# Altium PCB PCB3.PcbDoc
Units mm, origin at the board's own origin, x right, y up, seen from the top; angles counter-clockwise.
Board outline 61.81 x 53.79 mm, 2 copper layers (Top Layer, Bottom Layer); 12 components, 9 nets, 48 pads, 8 vias.
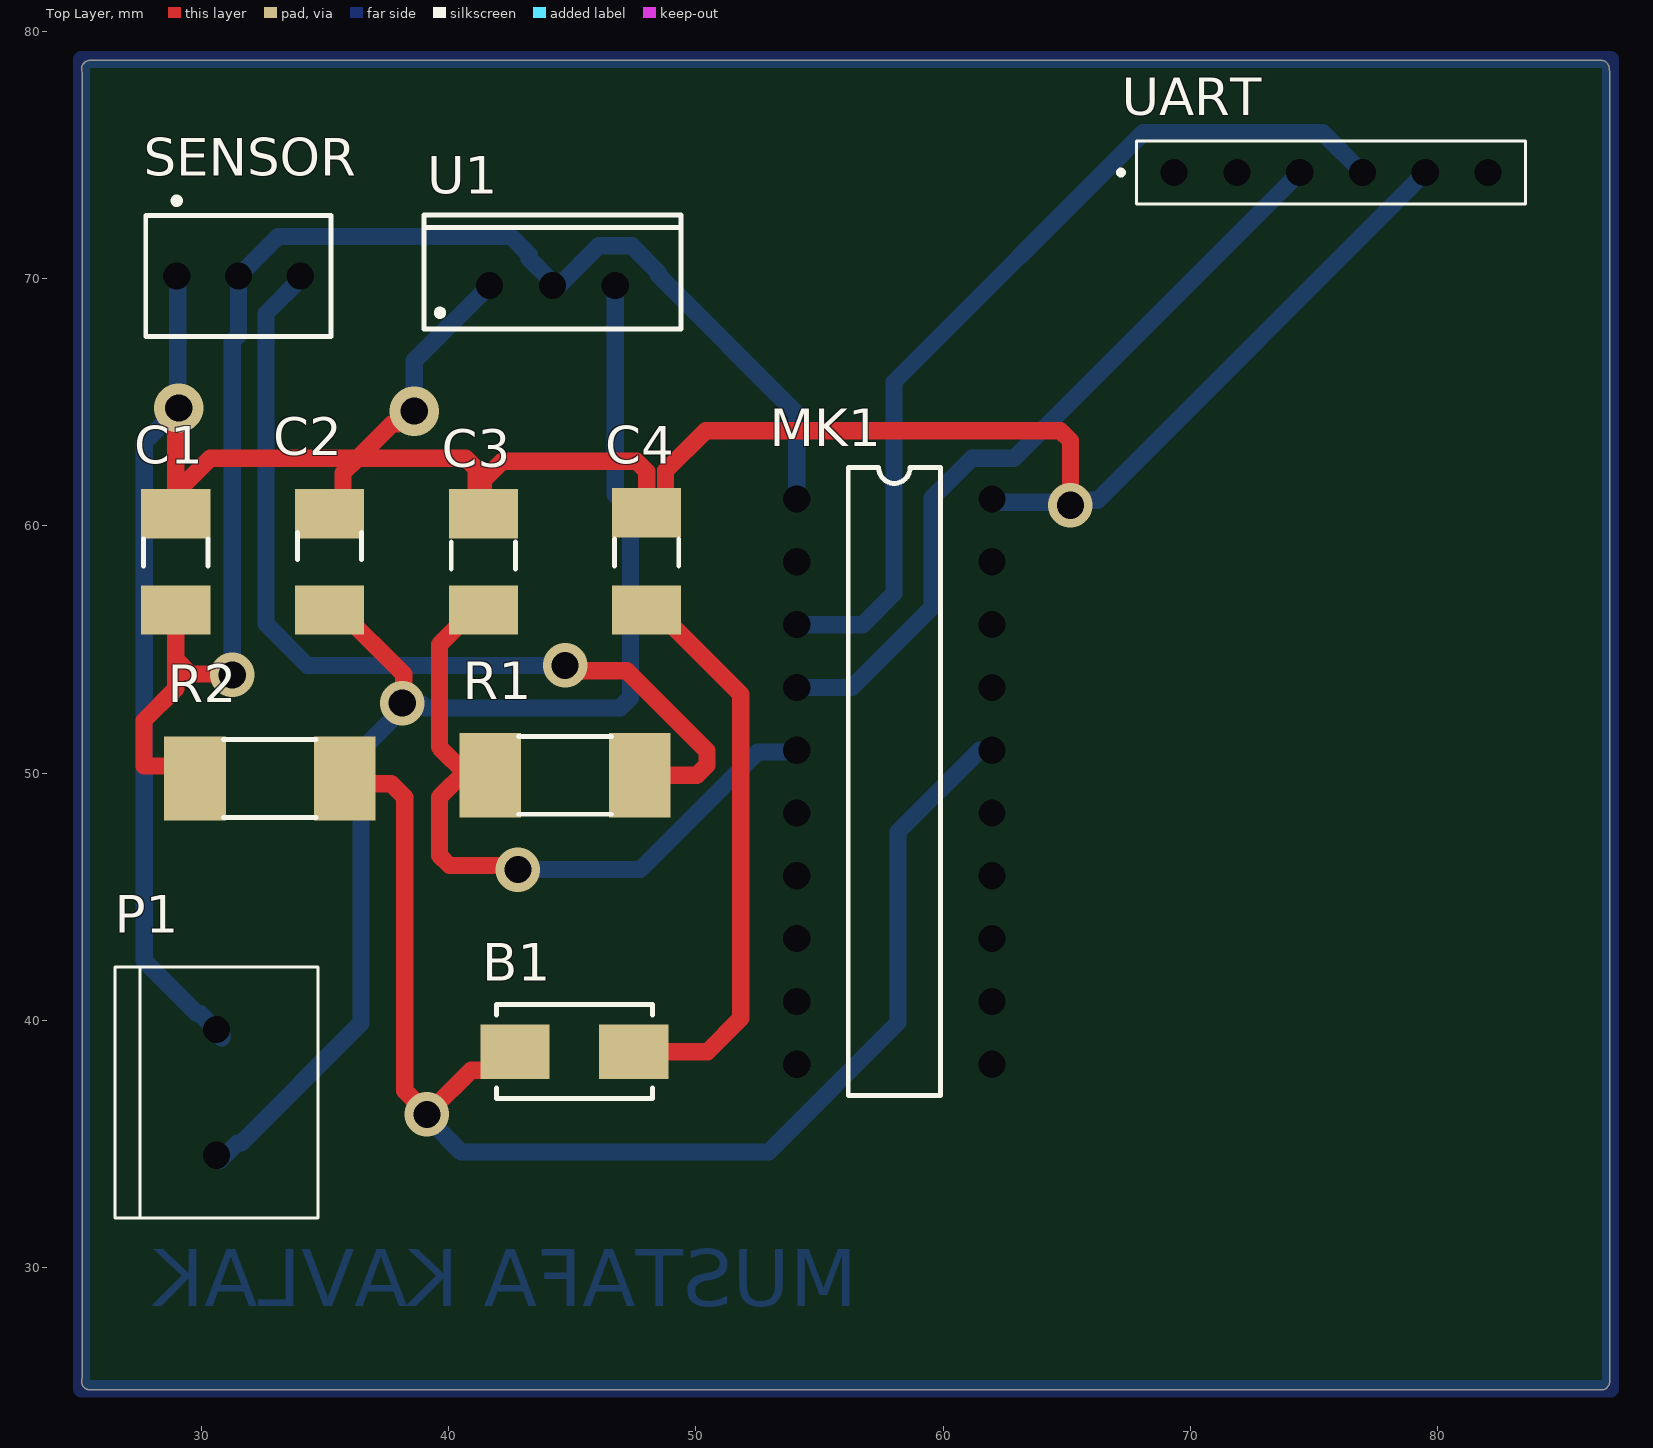
[diagram p0: Top Layer view]
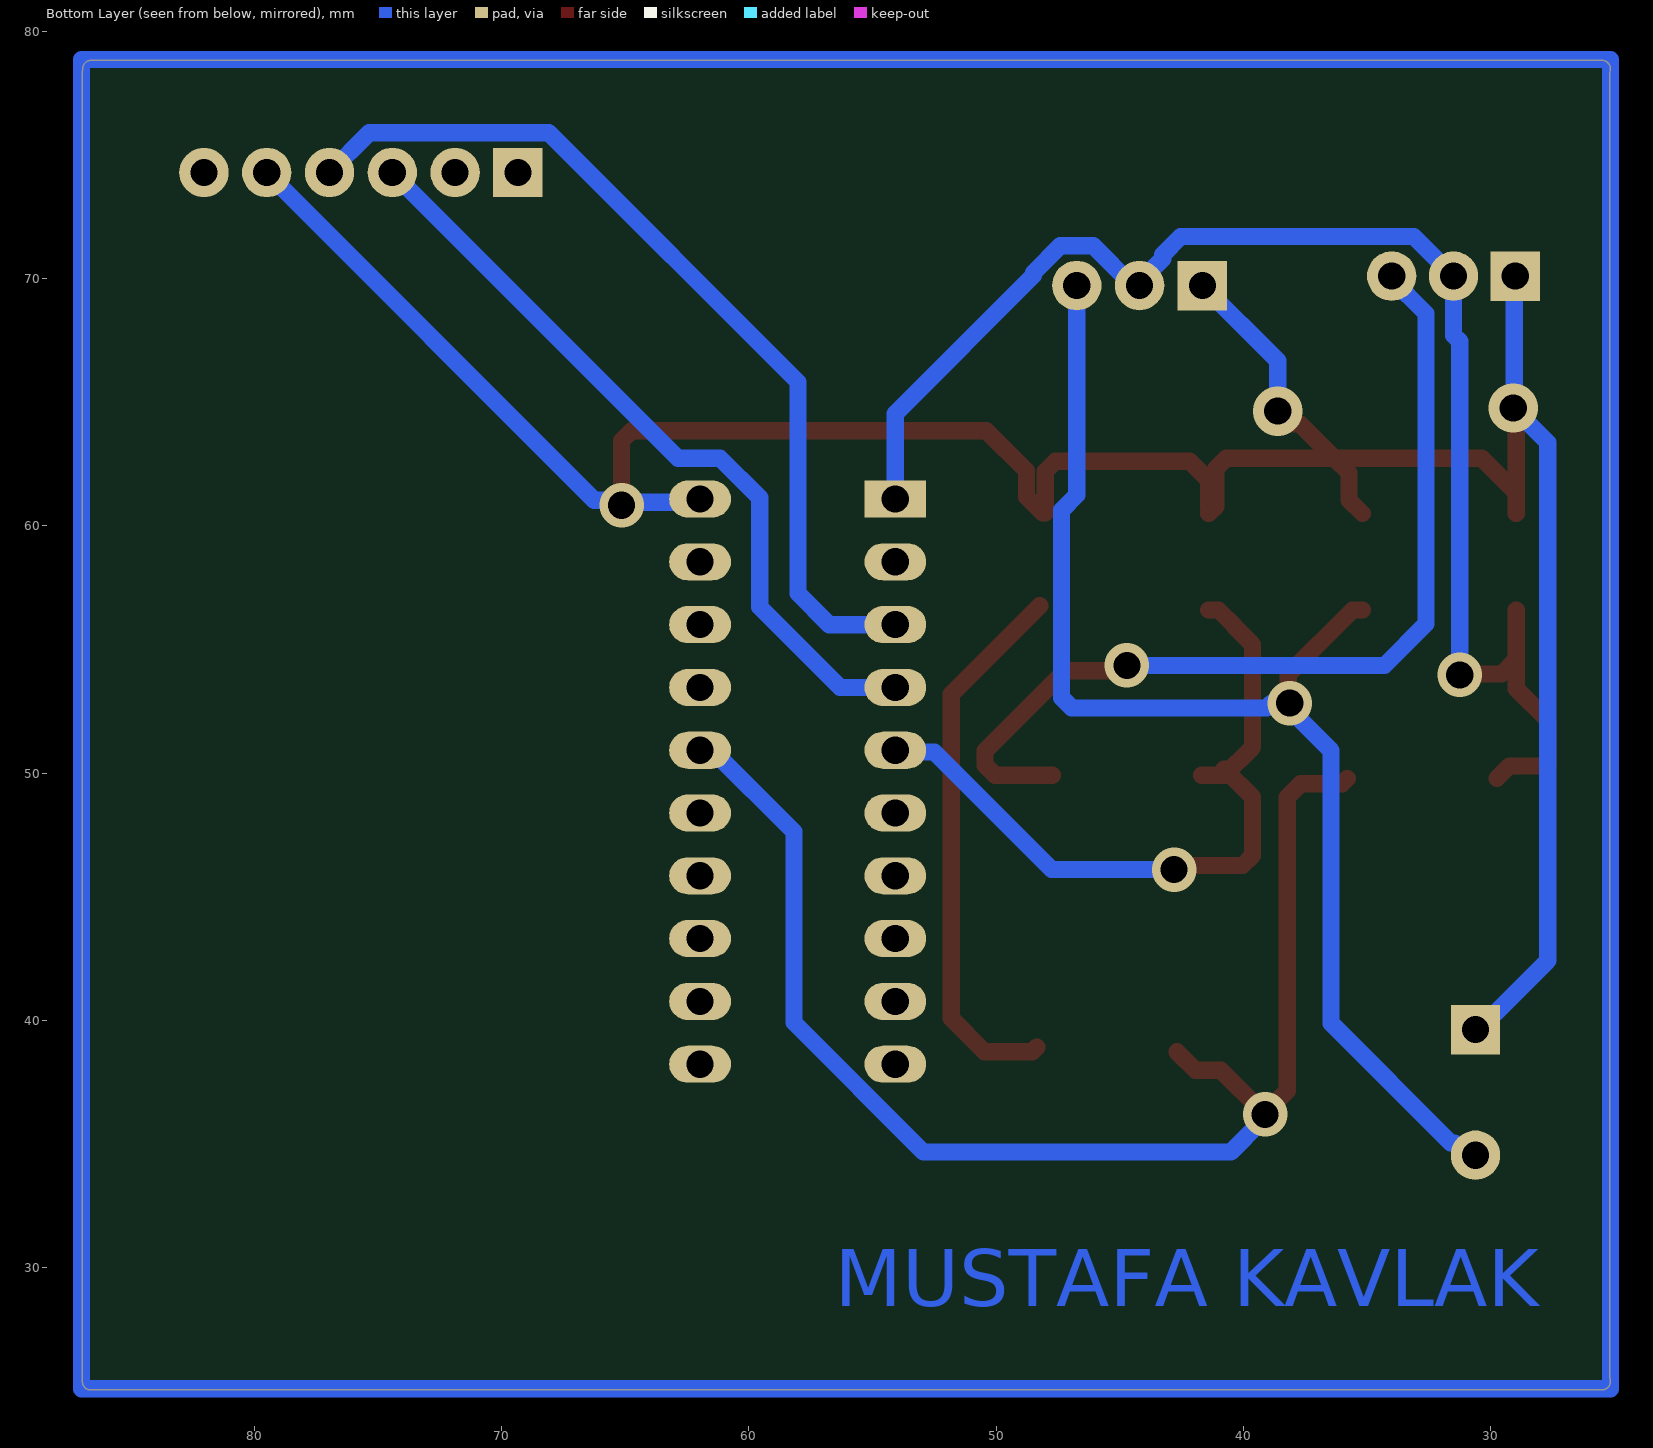
[diagram p1: Bottom Layer view, seen from below]
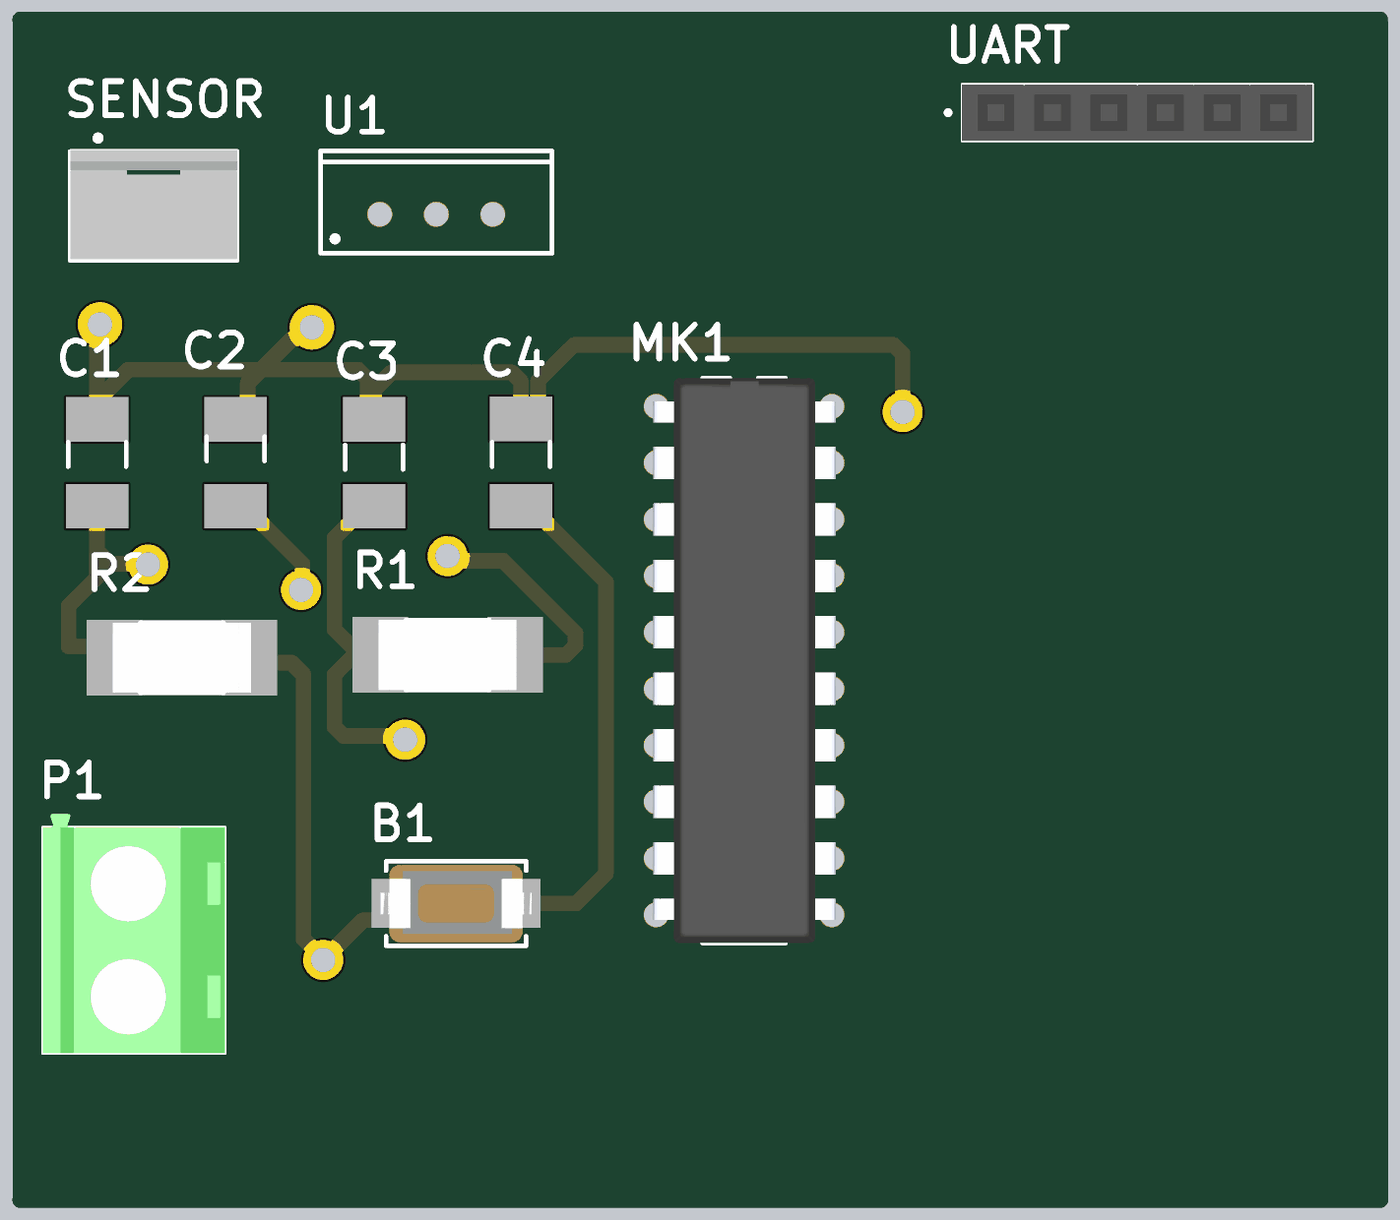
[diagram p2: 3D render of the assembled board from above, using the file's embedded part models]

## Layer stack, top to bottom
Top Solder: solder mask 0.0102, Solder Resist, Dk 3.5
Top Layer: signal copper 0.0356
Dielectric 1: dielectric 0.32, FR-4, Dk 4.8
Bottom Layer: signal copper 0.0356
Bottom Solder: solder mask 0.0102, Solder Resist, Dk 3.5

## Board outline
25.5,25.05 cw(c25.5,25.4) 25.177,25.535 25.177,78.351 cw(c25.5,78.486) 25.5,78.836 86.6,78.836 cw(c86.6,78.486) 86.95,78.486 86.964,78.359 86.964,25.4 cw(c86.614,25.4) 86.607,25.05 86.6,25.05

## Design rules (kind name [scope] priority, off if disabled: settings)
Clearance [All] p1: gap=0.254 ignorepadtopadclearanceinfootprint=FALSE except(0: Arc-Hole Track-Hole SMDPad-Hole THPad-Hole Via-Hole Fill-Hole Poly-Hole Region-Hole Text-Hole)
PolygonConnect [All] p1: connectstyle=Relief reliefconductorwidth=0.254 reliefentries=4 polygonreliefangle="90 Angle" airgapwidth=0.254
RoutingVias [All] p1: holewidth=0.711 width=1.27 viastyle="Through Hole" minholewidth=0.711 minwidth=1.27 maxholewidth=0.711 maxwidth=1.27
SolderMaskExpansion [All] p1: expansion=0.102 istentingtop=FALSE
Width [All] p1: maxlimit=0.8 minlimit=0.6 preferedwidth=0.7 minimp=50.000000 maximp=50.000000 favimp=50.000000
30 further rules are at their usual default settings.

## Components (designator, comment, footprint, x,y, rotation, side; value= is the part's Value field where it differs from the comment)
B1 "1" FP-147873-1-MFG 45.085,38.735 r0 top
C1 "10uF" CAPC1210(3225)100_M#1 28.956,58.928 r270 top value=10nF
C2 "100nF" CAPC1210(3225)100_M#2 35.179,59.182 r270 top value=10nF
C3 "100nF" CAPC1210(3225)100_M#3 41.402,58.801 r270 top value=10nF
C4 "100nF" CAPC1210(3225)100_M#4 48.006,58.928 r270 top value=10nF
MK1 "MSP430G2553" DIP20 54.076,61.087 r0 top
P1 "282837-2" TE_282837-2 30.607,37.084 r270 top
R1 "10K" FP-CRCW2512-e3-IPC_A 44.704,49.911 r180 top
R2 "10K" FP-CRCW2512-e3-IPC_A 32.766,49.784 r0 top
SENSOR "171825-3" TECO-171825-3_V 31.496,70.104 r0 top (schematic designator SENSÖR)
U1 "LD1117V33" TO220 44.196,69.723 r0 top
UART "." SULLINS_PPTC061LFBN-RC 75.692,74.295 r0 top

## Footprints (in the part's own frame and the unit in brackets; to place one, negate y for a bottom-side part, rotate by r counter-clockwise, add the part's x,y. Pads: shape width x height; smd on the part's side, far side on the other; paste and mask are expansions set on the pad)
CAPC1210(3225)100_M#1 [mm] "Chip Capacitor, Body 3.2x2.5mm, Height 1mm, IPC Low Density"
  rect 2x2.8 smd: 1(-1.572,0) 2(2.328,0)
  silkscreen extent -0.55,-1.3 0.55,1.3, body extent -1.7,-1.35 1.7,1.35, height 1
CAPC1210(3225)100_M#2 [mm] "Chip Capacitor, Body 3.2x2.5mm, Height 1mm, IPC Low Density"
  rect 2x2.8 smd: 1(-1.318,0) 2(2.582,0)
  silkscreen extent -0.55,-1.3 0.55,1.3, body extent -1.7,-1.35 1.7,1.35, height 1
CAPC1210(3225)100_M#3 [mm] "Chip Capacitor, Body 3.2x2.5mm, Height 1mm, IPC Low Density"
  rect 2x2.8 smd: 1(-1.699,0) 2(2.201,0)
  silkscreen extent -0.55,-1.3 0.55,1.3, body extent -1.7,-1.35 1.7,1.35, height 1
CAPC1210(3225)100_M#4 [mm] "Chip Capacitor, Body 3.2x2.5mm, Height 1mm, IPC Low Density"
  rect 2x2.8 smd: 1(-1.6,0) 2(2.328,0)
  silkscreen extent -0.55,-1.3 0.55,1.3, body extent -1.7,-1.35 1.7,1.35, height 1
DIP20 [mm]
  rect 0x0 / inner rect 2.5x1.5 / far side rect 2.5x1.5 hole 1.1: 1(0,0)
  round 0 / inner oval 2.5x1.5 / far side oval 2.5x1.5 hole 1.1: 2(0,-2.54) 3(0,-5.08) 4(0,-7.62) 5(0,-10.16) 6(0,-12.7) 7(0,-15.24) 8(0,-17.78) 9(0,-20.32) 10(0,-22.86) 11(7.9,-22.86) 12(7.9,-20.32)
  oval 2.5x0 / inner round 0 / far side oval 2.5x1.5 hole 1.1: 13(7.9,-17.78) 16(7.9,-10.16)
  oval 2.5x0 / inner oval 2.5x1.5 / far side oval 2.5x1.5 hole 1.1: 14(7.9,-15.24) 15(7.9,-12.7) 17(7.9,-7.62) 18(7.9,-5.08) 19(7.9,-2.54)
  round 0 / inner round 0 / far side oval 2.5x1.5 hole 1.1: 20(7.9,0)
  silkscreen extent 2.08,-24.13 5.81,1.27, body extent -0.13,-24.13 8.07,1.27, height 5.08
FP-147873-1-MFG [mm]
  rect 2.8x2.2 smd paste+0 mask+0: 1(-2.4,0) 2(2.4,0)
  silkscreen extent -3.15,-1.9 3.15,1.9, body extent -3.9,-2 3.9,2, height 0.25
FP-CRCW2512-e3-IPC_A [mm]
  rect 2.5x3.408 smd paste+0 mask+0: 1(-3.026,0) 2(3.026,0)
  silkscreen extent -1.87,-1.58 1.87,1.58, body extent -4.3,-2.2 4.3,2.2, height 0.25
SULLINS_PPTC061LFBN-RC [mm]
  rect 0x0 / inner rect 1.605x1.605 / far side rect 2x2 hole 1.1: 1(-6.35,0)
  round 0 / inner round 1.605 / far side round 2 hole 1.1: 2(-3.81,0) 3(-1.27,0) 4(1.27,0) 5(3.81,0) 6(6.35,0)
  silkscreen extent -8.6,-1.27 7.87,1.27, body extent -7.87,-1.27 7.87,1.27, height 8.51
TE_282837-2 [mm]
  rect 0x0 / inner round 1.65 / far side rect 2x2 hole 1.1: 1(-2.54,0)
  round 0 / inner round 1.65 / far side round 2 hole 1.1: 2(2.54,0)
  silkscreen extent -5.08,-4.1 5.08,4.1, body extent -5.68,-4.1 5.08,4.1, height 10
TECO-171825-3_V [mm] "Connector, 3-Leads, Body 4.9x7.5mm, Pitch 2.5mm"
  rect 0x0 / inner rect 1.4x1.4 / far side rect 2x2 hole 1.1: 1(-2.5,0)
  round 0 / inner round 1.4 / far side round 2 hole 1.1: 2(0,0) 3(2.5,0)
  silkscreen extent -3.75,-2.45 3.75,3.17, body extent -3.75,-2.4 3.75,2.5, height 10.4
TO220 [mm] "TO, Thru-Hole, Vertical, Heatsink Mounted; 3 In-Line Leads; Pitch 2.54 mm"
  rect 0x0 / inner rect 1.7x1.7 / far side rect 2x2 hole 1.1: 1(-2.54,0)
  round 0 / inner round 1.7 / far side round 2 hole 1.1: 2(0,0) 3(2.54,0)
  silkscreen extent -5.2,-1.75 5.2,2.85, body extent -5.25,-1.8 5.25,2.9, height 19.7

## Part data
B1: library part CMP-03407-000005-1, "SWITCH TACTILE SPST-NO 0.05A 24V", Contact Current Rating=50mA, Contact Resistance=100mΩ, Manufacturer="TE Connectivity", Manufacturer Part Number=147873-1, Operating Force=180gf, Package=0, Temperature="-35°C to +85°C", Temperature Range High=+85°C, Temperature Range Low=-35°C, Voltage Rating Dc=24V, Automotive=No, Category=Switch, ComponentLink2Description=Datasheet, ComponentLink2URL=https://www.te.com/commerce/DocumentDelivery/DDEController?Action=showdoc&DocId=Customer+Drawing%7F147873%7FK3%7Fpdf%7FEnglish%7FENG_CD_147873_K3.pdf%7F147873-1, Device Class L1=Electromechanical, Device Class L2=Switches, Device Class L3="Tactile Switches", Digikey Description="SWITCH TACTILE SPST-NO 0.05A 24V", Electromechanical Life=40000Cycles, Height=5.5mm, Lead Free=Yes, Mount="Surface Mount", Mouser Description="Switch Tactile OFF (ON) SPST Rectangular Button J-Bend 0.05A 24VDC 1.77N SMD T/R", Octopart=https://octopart.com/147873-1-te+connectivity-40818451, RoHS=TRUE, Throw Configuration=SPST-NO
C1 C2 C3 C4: library part CMP-1038-01141-1, "CAP 10nF 250V ±5% 1210 (3225 Metric) Thickness 1mm SMD", Case-EIA=1210, Case-Metric=3225, Rated Voltage="250 V", Tolerance=Â±5%, Max Thickness="1 mm", Technology=SMT
P1: "Ð Ð°Ð·ÑŠÐµÐ¼Ð½Ñ‹Ðµ ÐºÐ»ÐµÐ¼Ð¼Ð½Ñ‹Ðµ ÐºÐ¾Ð»Ð¾Ð´ÐºÐ¸ Ð Ð¾Ð·ÐµÑ‚ÐºÐ° 2 Ð¿Ð¾Ð»Ð¾Ð¶ÐµÐ½Ð¸Ñ 5,08 Ð¼Ð¼ ÐŸÑ€Ð¸Ð¿Ð¾Ð¹ Ð¿Ñ€ÑÐ¼Ð¾Ð¹ Ñ‡ÐµÑ€ÐµÐ· Ð¾Ñ‚Ð²ÐµÑ€ÑÑ‚Ð¸Ðµ 13,5 Ð / ÐºÐ¾Ð½Ñ‚Ð°ÐºÑ‚", Package=None, Availability="In Stock", Check_prices=https://www.snapeda.com/parts/282837-2/TE+Connectivity+AMP+Connectors/view-part/?ref=eda, MF="TE Connectivity", MP=282837-2, Price=None, Purchase-URL=https://pricing.snapeda.com/search/part/282837-2/?ref=eda, SnapEDA_Link=https://www.snapeda.com/parts/282837-2/TE+Connectivity+AMP+Connectors/view-part/?ref=snap
R1 R2: library part CMP-02407-002758-1, "RES Thick Film, 10kΩ, 5%, 1W, 200ppm/°C, 2512", Case Code (Metric)=6432, Case Code (Imperial)=2512, Max Operating Temperature=155°C, Max Power Dissipation=1W, Min Operating Temperature=-55°C, Package Quantity=1, Resistance=10kR, Temperature Coefficient=200ppm/°C, Tolerance=5%, Voltage Rating=500V, Case/Package=2512, Composition="Thick Film", Contact Plating=Tin, Depth=3.15mm, Features="Automotive AEC-Q200", Height=0.028inch, Lead Free="Lead Free", Length=6.3mm, Military Standard=Not, Mount="Surface Mount", Number of Pins=2, Number of Terminations=2, Packaging="Tape and Reel", Power Rating=1W, Radiation Hardening=No, REACH SVHC="No SVHC", Termination=SMD/SMT, Voltage Rating (DC)=500V, Weight=0.001429oz, Width=0.124inch
SENSOR: library part CMP-2000-07494-1, "Male Header, Pitch 2.5 mm, 1 x 3 Position, Height 10.4 mm, Tail Length 3.6 mm,  / -20 to 95 degC / , RoHS, Bulk", Colour=Natural, Contact Resistance=20mOhm, Flammability Rating=UL94V-0, Manufacturer="TE Connectivity", Max Current Rating=3.5A, Max Operating Temperature=95degC, Max Voltage Rating (AC)=250V, Max Voltage Rating (DC)=350.25kV, Min Operating Temperature=-20degC, Package Description="Male Header, Pitch 2.5 mm, 1 x 3 Position, Height 10.4 mm, Tail Length 3.6 mm", Package Quantity=1000, Voltage Rating=350V, Approvals=UL, Backwall/Post Interruptions=No(Without), Connector Type=Header, Contact Gender=Male, Contact material=Brass, Contact Mating Length=0.295inch, Contact Plating=Tin, Contact Retention=No(Without), Contact Shape=Square, Datasheet URL=http://www.te.com/commerce/DocumentDelivery/DDEController?Action=showdoc&DocId=Customer+Drawing%7F171825%7FY3%7Fpdf%7FEnglish%7FENG_CD_171825_Y3.pdf%7F171825-3, Datasheet Version="Rev. Y3, 12/2016", Depth=4.9mm, Height=0.409inch, Housing Colour=Natural, Housing Material=Nylon, Length=7.5mm, Manufacturer URL=http://www.te.com/, Mating Alignment=Yes(With), Mating Post Length=7.5mm, Mating Retention=Yes(With), Mount=ThroughHole, Mounting Technology=ThroughHole, Number of Contacts=3, Number of Positions=3, Number of Rows=1, Orientation=Straight, Package Reference=171825-3, Packaging=Bag, Panel Mount Retention=No(Without), PCB Mount Alignment=No(Without), PCB Mount Retention=Without, PCB Mounting Orientation=Vertical, PCB Thickness=0.063inch, Pitch=2.5mm, Plating Thickness=0.8um, REACH SVHC=NoSVHC, RoHSCompliant=True, Strain Relief=No(Without), Tail Length=0.142inch, Termination=Solder
U1: library part CMP-0244-00470-1, "Fixed Low Drop Positive Voltage Regulator, 3.3V, 3-Pin TO-220", ComponentLink1Description="Manufacturer URL", ComponentLink1URL=http://www.st.com, ComponentLink2Description=Datasheet, ComponentLink2URL=http://www.st.com/internet/com/TECHNICAL_RESOURCES/TECHNICAL_LITERATURE/DATASHEET/CD00000544.pdf, ComponentLink3Description="Package Specification", ComponentLink3URL=http://www.st.com/internet/com/TECHNICAL_RESOURCES/TECHNICAL_LITERATURE/PACKAGE_INFORMATION/CD00004649.pdf, DatasheetVersion=1/11/2011, PackageDescription="TO, Thru-Hole, Vertical, Heatsink Mounted; 3 In-Line Leads; Pitch 2.54 mm", PackageReference=TO220, PackageVersion=ver3.0
UART: library part PPTC061LFBN-RC, Package=None, Availability=Unavailable, MF="{'manufacturer': u'Sullins Connector Solutions'}", MP=PPTC061LFBN-RC, Price=None

## Via types
v1: diameter 1.8, hole 1.1, Top Layer to Bottom Layer, 6 vias
v2: diameter 2, hole 1.1, Top Layer to Bottom Layer, 2 vias

## Nets (pads, with @x,y where several pads share a name; then routed paths per layer and width w, separated by ;. In a path a pad name is that pad's centre, name@x,y a point inside that pad or via, vN(x,y) a via of type N, cw(c..) or ccw(c..) an arc to the next point about the centre after c; other vN are vias at no path point)
GND: C1.1 C2.1 C3.1 C4.1 MK1.20 P1.1 SENSOR.1 U1.1 UART.5 | length 118.9
  Top Layer w0.7: C1.1 C1.1@28.956,61.341 ; v2(29.083,64.77) 28.956,64.643 C1.1@28.956,61.341 ; C2.1 35.724,61.045 35.724,62.14 36.322,62.738 ; v2(38.608,64.643) 38.454,64.643 37.949,64.138 37.722,64.138 36.322,62.738 ; C3.1 41.101,60.801 41.101,62.328 40.691,62.738 36.322,62.738 ; C3.1@41.402,60.702 41.402,61.849 42.164,62.611 47.596,62.611 48.006,62.201 C4.1 48.118,60.528 48.768,61.178 48.768,62.23 50.391,63.853 64.741,63.853 65.151,63.443 v1@65.151,61.341 ; v1@64.853,60.833 v1(65.151,60.833) ; C1.1@28.956,61.341 30.353,62.738 36.322,62.738
  Bottom Layer w0.7: SENSOR.1 29.039,70.06 29.039,64.814 v2(29.083,64.77) 27.686,63.373 27.686,42.418 29.83,40.274 29.957,40.274 30.816,39.415 P1.1@30.816,39.288 ; v2(38.608,64.643) 38.611,64.646 38.611,66.678 U1.1 ; MK1.20 62.103,60.96 65.024,60.96 v1(65.151,60.833) 65.361,61.043 66.25,61.043 UART.5
NetB1_1: B1.1 MK1.16 R2.2 | length 55.9
  Top Layer w0.7: R2.2 36.008,49.567 37.682,49.567 38.227,49.022 38.227,37.155 39.116,36.266 v1(39.116,36.195) ; v1@39.243,36.322 40.906,37.985 41.935,37.985 B1.1
  Bottom Layer w0.7: v1@38.989,36.322 v1@39.285,36.322 ; v1@39.348,36.681 39.285,36.618 v1@39.285,36.322 ; MK1.16 61.476,50.927 58.176,47.627 58.176,39.912 52.935,34.671 40.513,34.671 39.285,35.899 v1@39.285,36.322
NetB1_2: B1.2 C4.2 | length 22.3
  Top Layer w0.7: C4.2@48.231,56.775 51.816,53.19 51.816,40.081 50.47,38.735 48.535,38.735 B1.2@48.355,38.915
NetC1_2: C1.2 MK1.1 R2.1 SENSOR.2 U1.2 | length 58.9
  Top Layer w0.7: C1.2 28.956,54.61 ; R2.1 29.232,50.292 27.675,50.292 27.675,52.128 28.956,53.409 28.956,54.61 ; v1(31.242,53.975) 31.208,54.009 29.557,54.009 28.956,54.61
  Bottom Layer w0.7: v1(31.242,53.975) 31.242,67.464 31.496,67.718 SENSOR.2 33.1,71.708 42.525,71.708 43.26,70.973 43.26,70.805 44.196,69.869 U1.2 ; U1.2@44.468,69.723 46.072,71.327 47.4,71.327 48.485,70.242 48.485,70.133 54.076,64.542 MK1.1
NetC2_2: C2.2 P1.2 U1.3 | length 52.9
  Top Layer w0.7: C2.2 35.579,56.6 38.182,53.997 38.182,52.894 v1(38.12,52.832)
  Bottom Layer w0.7: P1.2@30.747,34.332 31.454,35.04 31.611,35.04 36.449,39.878 36.449,50.907 38.12,52.578 v1(38.12,52.832) ; v1@38.618,52.588 38.862,52.832 39.056,52.638 46.941,52.638 47.351,53.048 47.351,60.635 46.736,61.25 U1.3
NetC3_2: C3.2 MK1.5 R1.2 | length 29.7
  Top Layer w0.7: R1.2@40.767,50.165 39.624,49.022 39.624,46.676 40.034,46.266 42.634,46.266 v1(42.799,46.101) ; C3.2 41.002,56.6 40.352,55.95 40.352,55.916 39.624,55.188 39.624,51.054 40.767,49.911 R1.2
  Bottom Layer w0.7: v1(42.799,46.101) 47.752,46.101 52.504,50.853 54.002,50.853 MK1.5
NetMK1_3: MK1.3 UART.4 | length 36.8
  Bottom Layer w0.7: MK1.3 56.744,56.007 58.014,57.277 58.014,65.821 68.092,75.899 75.358,75.899 UART.4
NetMK1_4: MK1.4 UART.3 | length 31.6
  Bottom Layer w0.7: MK1.4 56.312,53.467 59.563,56.718 59.563,61.135 61.166,62.738 62.865,62.738 UART.3
NetR1_1: R1.1 SENSOR.3 | length 38.1
  Top Layer w0.7: v1(44.704,54.356) 44.914,54.146 47.2,54.146 50.445,50.901 50.445,50.321 50.035,49.911 R1.1
  Bottom Layer w0.7: SENSOR.3 33.996,69.981 32.608,68.593 32.608,56.038 34.29,54.356 v1(44.704,54.356)
pads on no net: MK1.2 MK1.6 MK1.7 MK1.8 MK1.9 MK1.10 MK1.11 MK1.12 MK1.13 MK1.14 MK1.15 MK1.17 MK1.18 MK1.19 UART.1 UART.2 UART.6
copper on no net: | length 231.1
  Bottom Layer w0.7: 25.146,78.8 25.146,25.1 56.167,25.1 86.995,25.1 ; 25.146,78.867 86.995,78.867 ; 86.995,25.146 86.995,78.8

## Other copper
Bottom Layer:
  text "MUSTAFA KAVLAK" at 56.523,28.44 h2.3